# Altium PCB hong ngoai.PcbDoc
Units mil, origin at the board's own origin, x right, y up, seen from the top; angles counter-clockwise.
Board outline 6000 x 4000 mil, 2 copper layers (Top Layer, Bottom Layer); 9 components, 7 nets, 26 pads, 2 vias.
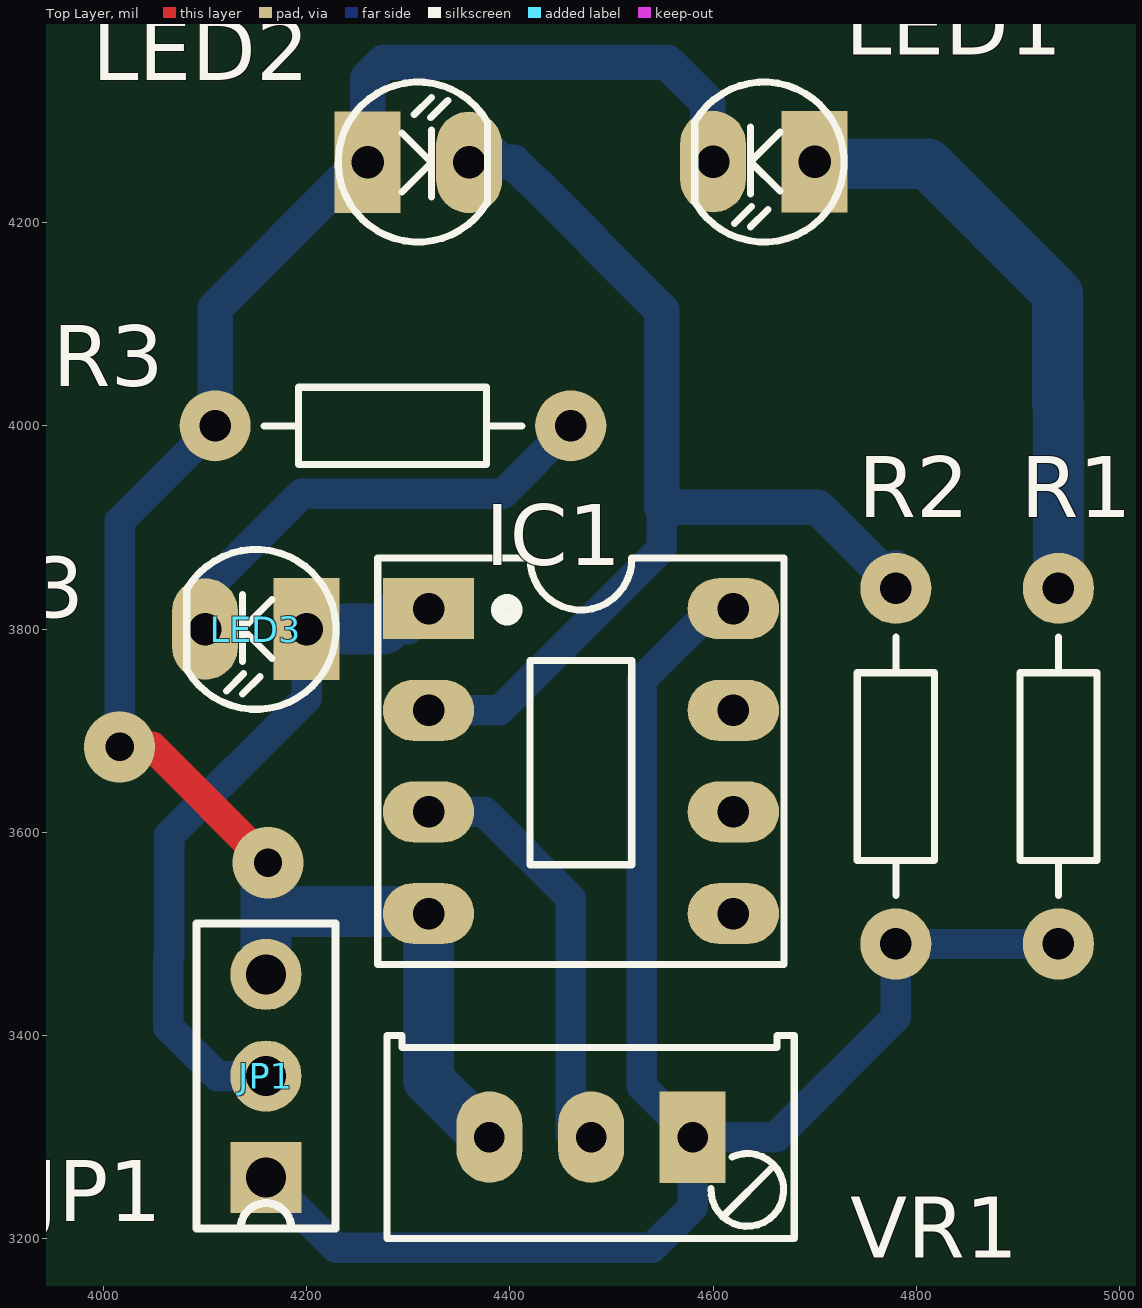
[diagram p0: Top Layer view]
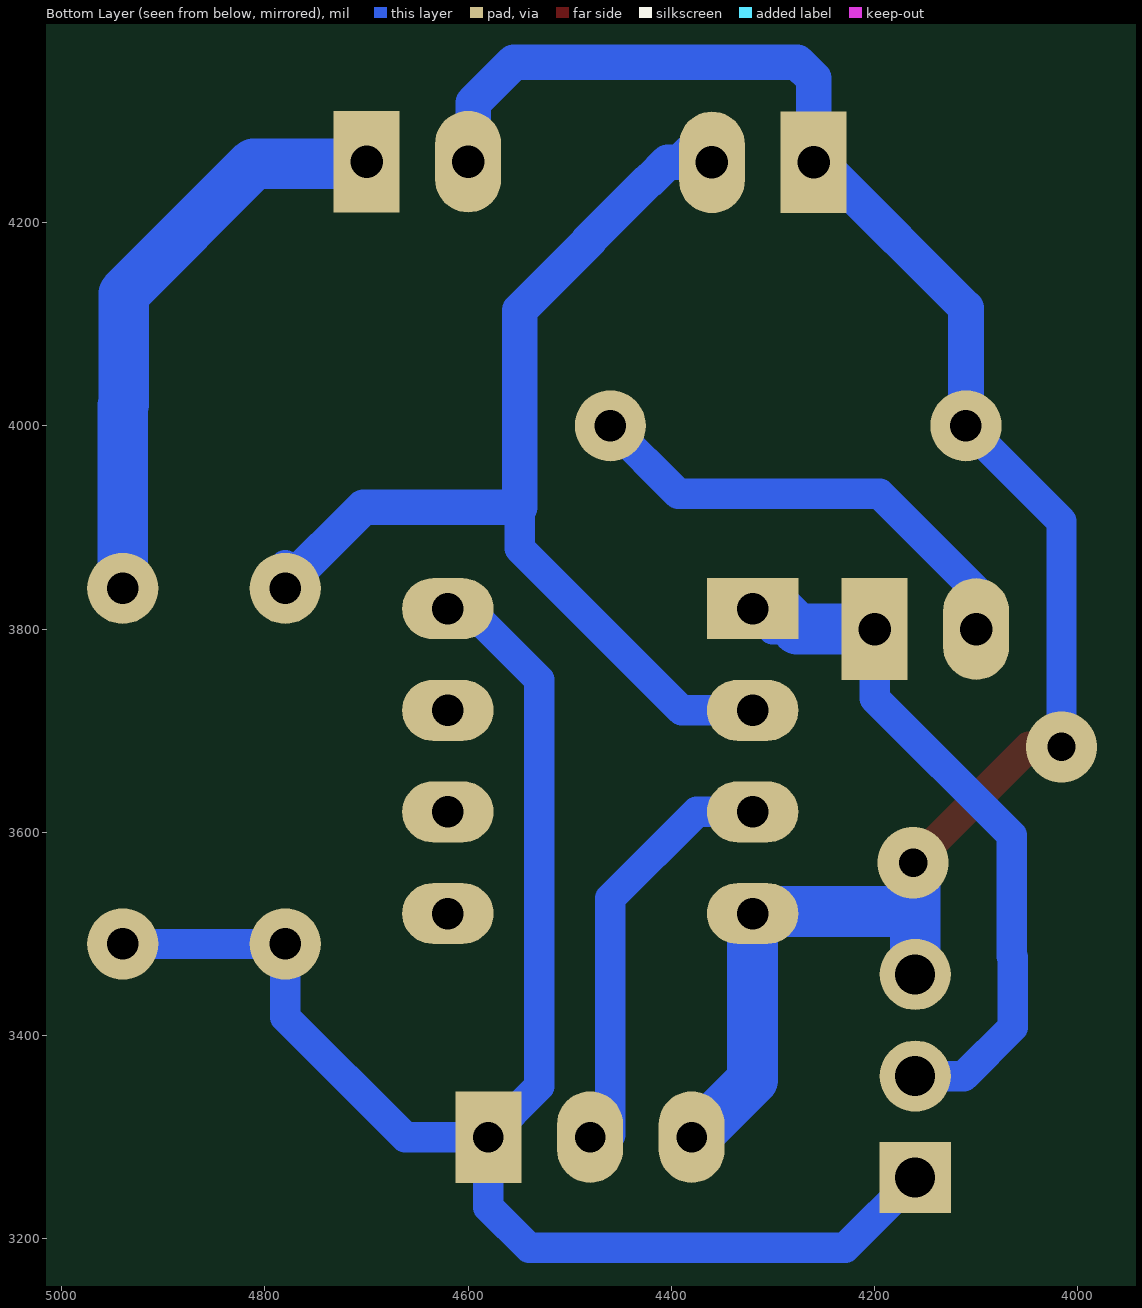
[diagram p1: Bottom Layer view, seen from below]
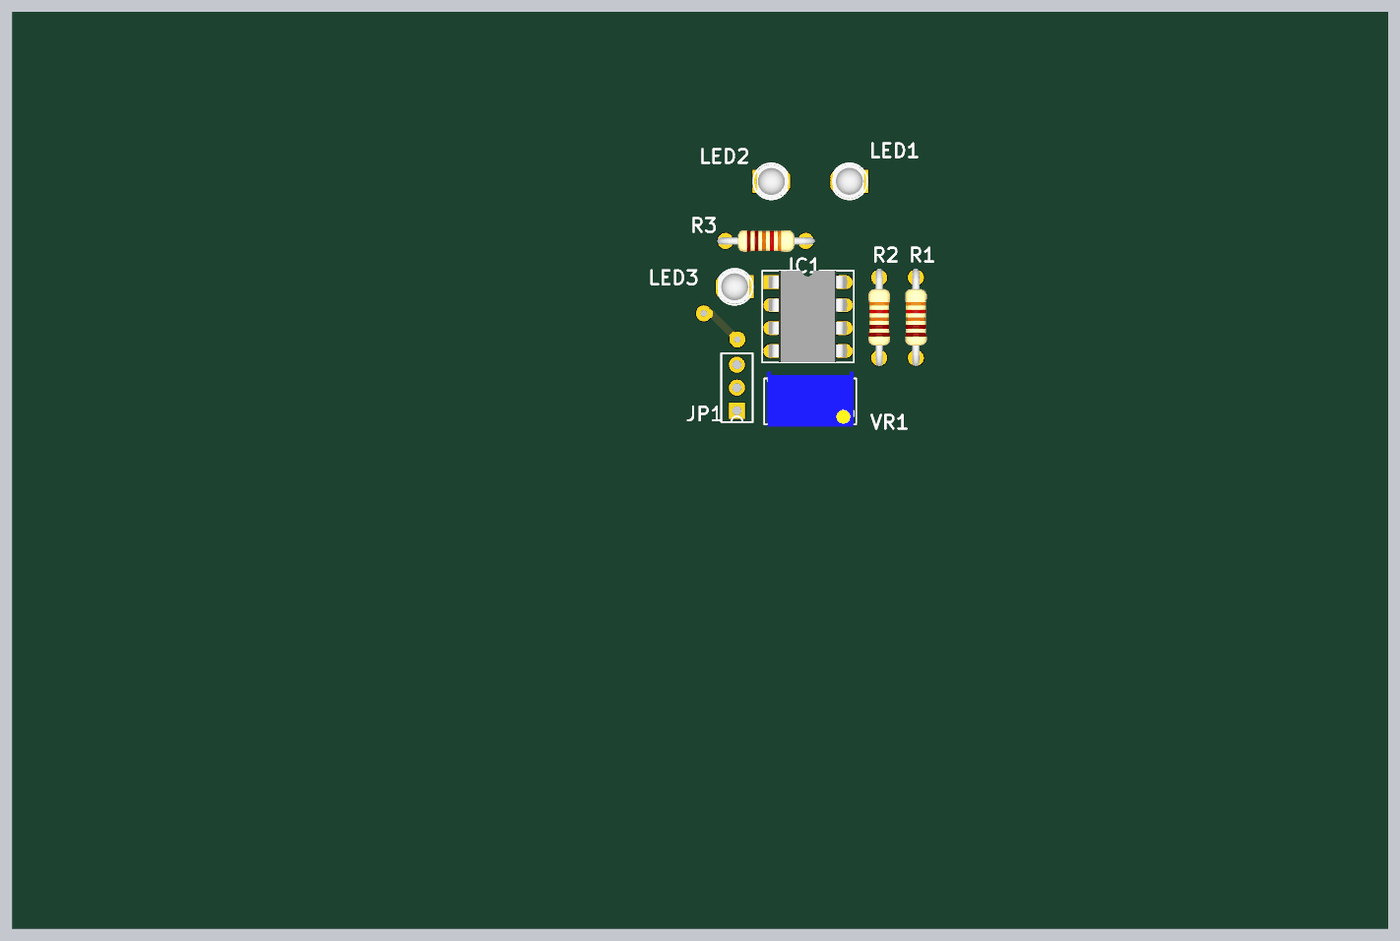
[diagram p2: 3D render of the assembled board from above, using the file's embedded part models]

## Layer stack, top to bottom
Top Layer: signal copper 1.4
Dielectric: dielectric 12.6, FR-4, Dk 4.8
Bottom Layer: signal copper 1.4

## Board outline
1000,1000 7000,1000 7000,5000 1000,5000

## Design rules (kind name [scope] priority, off if disabled: settings)
Clearance [All] p1: gap=10
PolygonConnect [All] p1: connectstyle=Relief reliefconductorwidth=10 reliefentries=4 polygonreliefangle="90 Angle"
RoomDefinition "HONG NGOAI" [InComponentClass('HONG NGOAI')] p1: confinementstyle=ConfineIn formatcopy=TRUE lockcomponents=FALSE outline 7053,1004 9313,1004 9313,1544 7053,1544
RoutingVias [All] p1: holewidth=28 width=50 viastyle="Through Hole" minholewidth=28 minwidth=50 maxholewidth=28 maxwidth=50
SilkscreenOverComponentPads [All] p1: minsilkscreentomaskgap=10
SolderMaskExpansion [All] p1: expansion=4
Width [All] p1: maxlimit=35 minlimit=35 preferedwidth=35
27 further rules are at their usual default settings.

## Components (designator, comment, footprint, x,y, rotation, side; value= is the part's Value field where it differs from the comment)
IC1 "LM358" DIP8/W0.3 4320,3820 r270 top
JP1 "JP3" CON3 4160,3260 r180 top
LED1 "LED" LED-3 4700,4260 r180 top
LED2 "LED" LED-3 4260,4259.3 r0 top
LED3 "LED" LED-3 4200,3800 r180 top
R1 "330" R1/4W 4940,3840 r270 top
R2 "10k" R1/4W 4780,3840 r270 top
R3 "330" R1/4W 4460,4000 r180 top
VR1 "10K" VR1 4580,3300 r180 top

## Footprints (in the part's own frame and the unit in brackets; to place one, negate y for a bottom-side part, rotate by r counter-clockwise, add the part's x,y. Pads: shape width x height; smd on the part's side, far side on the other; paste and mask are expansions set on the pad)
CON3 [mil]
  rect 70x70 hole 39.37 unplated: 1(0,0)
  round 70 hole 39.37 unplated: 2(0,-100) 3(0,-200)
  silkscreen extent -68,-250 68,50
DIP8/W0.3 [mil] "8 PIN, W 300mil, Pin to pin 100mil"
  rect 60x90 hole 31: 1(0,0)
  oval 60x90 hole 31: 2(100,0) 3(200,0) 4(300,0) 5(300,300) 6(200,300) 7(100,300) 8(0,300)
  silkscreen extent -50,-50 350,350, body extent -50,-40 350,336, height 201
LED-3 [mil] "LED 2 PIN, 3ly Only colour"
  rect 65x100 hole 32: 1(0,0)
  oval 65x100 hole 32: 2(100,0)
  silkscreen extent -29,-78 118,79, body extent -13,-75 125,75, height 217
R1/4W [mil] "R 1/4W, 2 Pin, 350mil"
  round 70 hole 31: 1(0,0) 2(350,0)
  silkscreen extent 48,-38 302,38, body extent -40,-47 386,47, height 111
VR1 [mil] "Variable Resistor"
  rect 65x90 hole 30: 1(0,0)
  oval 65x90 hole 30: 2(100,0) 3(200,0)
  silkscreen extent -100,-100 301,100, body extent -88,-130 288,110, height 455

## Part data
IC1: "Low-Power Dual Operational Amplifier"
JP1: library part Con3, "Connector 3"
LED1 LED2 LED3: "LED Single colour Green and Red"
R1 R2 R3: library part R1/4W, "Resistor 1/4W"
VR1: library part VR1, "Var Resistor"

## Via types
v1: diameter 70, hole 28, Top Layer to Bottom Layer, 2 vias

## Nets (pads, with @x,y where several pads share a name; then routed paths per layer and width w, separated by ;. In a path a pad name is that pad's centre, name@x,y a point inside that pad or via, vN(x,y) a via of type N, cw(c..) or ccw(c..) an arc to the next point about the centre after c; other vN are vias at no path point)
GND: IC1.4 JP1.3 LED1.2 LED2.1 R3.2 VR1.3 | length 1897
  Top Layer w30: v1(4016,3684) 4048,3684 v1(4162,3570)
  Bottom Layer w30: v1(4016,3684) 4016,3906 R3.2 ; v1@4159,3563 v1@4160,3562 ; IC1.4@4308,3520 IC1.4
  Bottom Layer w35: R3.2 4110,4116 4243,4249 LED2.1@4261,4249 ; LED2.1 4260,4342 4276,4358 4555,4358 4595,4318 LED1.2@4595,4263
  Bottom Layer w50: JP1.3 4160,3522 ; v1@4160,3571 4160,3562 4160,3522 ; IC1.4@4308,3522 4160,3522 ; IC1.4 4320,3356 VR1.3@4378,3298 ; LED1.2@4602,4263 4602,4254 4603,4253 LED1.2@4603,4251
NetIC1_2: IC1.2 LED2.2 R2.1 | length 1073.4
  Bottom Layer w30: IC1.2 4390,3720 4549.42,3879.42 4549.42,3920 4554.42,3915 ; 4421.5,4242.5 4424.55,4239.45 ; R2.1 4780,3843 R2.1@4780,3863
  Bottom Layer w35: LED2.2 4403.7,4259.3 4421,4242 ; 4424.55,4239.45 4481.5,4182.5 ; 4481,4182 4549.42,4113.58 4549.42,3920 4703,3920 4780,3843 R2.1@4781,3842
NetIC1_3: IC1.3 VR1.2 | length 420.9
  Bottom Layer w30: IC1.3 4375,3620 4460,3535 4460,3302 VR1.2@4469,3311
NetLED1_1: LED1.1 R1.1 | length 586.3
  Bottom Layer w30: LED1.1 LED1.1@4702,4258
  Bottom Layer w50: LED1.1@4702,4258 4811,4258 4939,4130 4939,4021 4940,4020 R1.1 R1.1@4940,3837
NetLED3_2: LED3.2 R3.1 | length 465.1
  Bottom Layer w30: LED3.2 4100,3838 4195,3933 4393,3933 R3.1
OUT: IC1.1 JP1.2 LED3.1 | length 737.5
  Bottom Layer w30: JP1.2 4112,3360 4064,3408 4064,3477 4065,3478 4065,3597 4200,3732 LED3.1 ; IC1.1@4282,3820 IC1.1 4300,3800 IC1.1@4293,3800
  Bottom Layer w50: LED3.1 4276,3800 IC1.1@4293,3817
VCC: IC1.8 JP1.1 R1.2 R2.2 VR1.1 | length 1618.9
  Bottom Layer w30: JP1.1@4140,3260 JP1.1@4150,3250 ; JP1.1 4229,3191 4540,3191 4580,3231 VR1.1 ; IC1.8 4600,3820 4530,3750 4530,3350 VR1.1 ; R1.2 R2.2 4780,3418 4662,3300 VR1.1
pads on no net: IC1.5 IC1.6 IC1.7
copper on no net: | length 19.8
  Bottom Layer w30: 4374,4280 4388,4266